# Altium PCB stimu.PcbDoc (part 2 of 2)
Units mm, origin at the board's own origin, x right, y up, seen from the top; angles counter-clockwise.
Board outline 36 x 36 mm, 6 copper layers (Top Layer, Signal Layer 1, Signal Layer 2, Signal Layer 3, Signal Layer 4, Bottom Layer), stack 1.231 mm thick; 97 components, 85 nets, 388 pads, 160 vias.
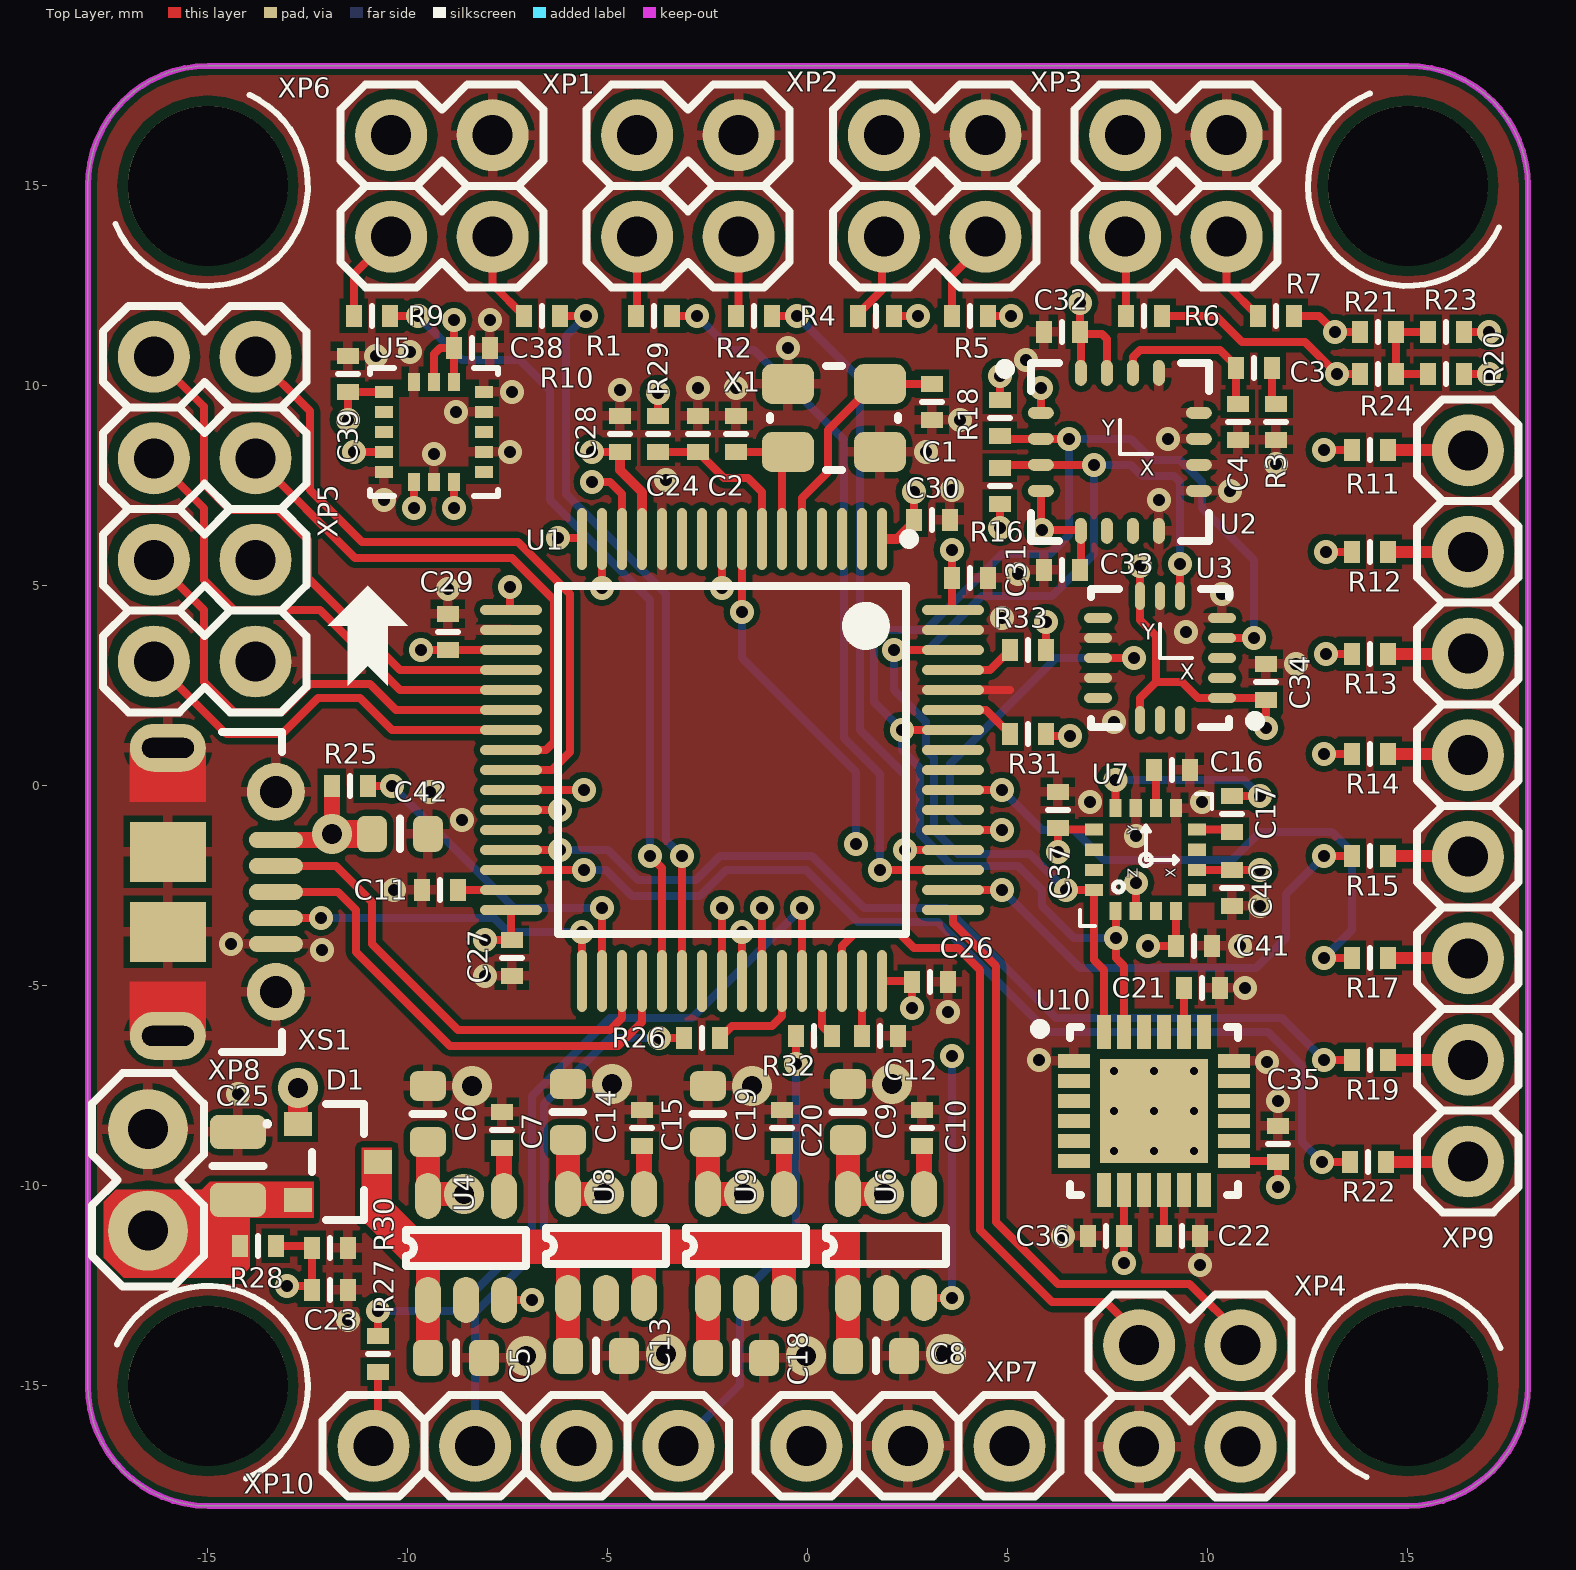
[diagram p0: Top Layer view]

## Via types
v1: diameter 0.6, hole 0.3, Top Layer to Bottom Layer, tented both sides, 137 vias
v2: diameter 1, hole 0.5, Top Layer to Bottom Layer, tented both sides, 14 vias
v3: diameter 0.5, hole 0.2, Top Layer to Bottom Layer, 9 vias

## Nets (pads, with @x,y where several pads share a name; then routed paths per layer and width w, separated by ;. In a path a pad name is that pad's centre, name@x,y a point inside that pad or via, vN(x,y) a via of type N, cw(c..) or ccw(c..) an arc to the next point about the centre after c; other vN are vias at no path point) (continued)
VDD: (continued)
  Top Layer w0.2: v1(-11.5,9.15) C39.1 ; C39.1@-11.45,9.85 U5.1 ; v1(-9.675,3.4) C29.1@-9.1,3.4 ; U5.15 -9.35,10.8 -9.2,10.95 C38.1 ; C29.1 U1.19 ; v1(-8.85,6.95) U5.8 U5.8@-8.85,7.65 ; U5.14 C38.1 ; v1(-8.85,11.65) C38.1 ; v1(-8.075,-3.85) -7.5,-3.85 -7.425,-3.775 U1.32 ; v1(-5.4,8.35) C28.1 ; R29.2 v1(-3.75,9.825) ; U1.48 2.575,-4.875 C26.1 v1(2.6,-5.55) ; C30.1 v1(2.65,7.35) ; v1(3.6,5.9) C31.1 3.6,4.425 U1.64 ; v1(4.8,6.45) R16.1 ; R18.1@4.8,9.6 R18.1 v1(4.8,10.25) ; U2.4 5.825,6.425 v1(5.85,6.4) 6.8,6.4 U2.5 6.825,5.375 C33.1@6.8,5.35 ; U2.1 v1(5.825,9.95) ; v1(6.25,-1.65) 6.25,-1.1 C37.1@6.262,-1.088 ; C37.1@6.262,-0.995 C37.1@6.262,-1.088 ; v1(6.8,12.075) C32.1 C32.1@6.8,11.3 ; U2.16 6.825,11.275 C32.1@6.8,11.3 ; U7.13 C37.1@6.262,-1.088 ; U2.15 7.475,11.175 7.35,11.3 C32.1@6.8,11.3 ; v1(7.9,-11.925) C36.1@7.9,-11.35 ; C36.1 U10.8 ; U7.2 v1(8.196,-2.425) ; U3.14 8.3,2.2 8.7,2.6 ; U3.8 8.3,4.15 8.7,3.75 8.7,2.6 ; U3.8@8.3,4.9 v1(8.3,5.5) ; v1(8.5,-4) C41.1 U7.4 ; U7.6 C40.1 v1(11.3,-2.1) ; U10.13 11.725,-9.375 C35.1 ; v1(11.45,1.45) C34.1 11.45,2.2 U3.1 9.75,2.2 9.35,2.6 8.7,2.6 ; v1(11.75,-10.025) C35.1@11.75,-9.45 ; R23.1@16.45,11.35 v1(17.025,11.35)
  Top Layer w0.25: C28.1 -4.7,7.9 -4.15,7.35 U1.13 ; U1.1 2.225,6.175 2.65,6.6 C30.1@2.7,6.6
  Top Layer w0.6: C14.2 U8.5 v2(-5.1,-10.2)
XTALI: C1.1 U1.5 X1.1 | length 5.9
  Top Layer w0.2: U1.5 -0.15,7.2 0.5,7.85 0.5,8.9 1.55,9.95 X1.1@1.55,10.05 ; X1.1 C1.1
XTALO: C2.1 U1.6 X1.3 | length 3.3
  Top Layer w0.2: C2.1 -0.75,8.35 -0.65,8.25 U1.6
pads on no net: U1.2 U1.3 U1.4 U1.10 U1.11 U1.28 U1.39 U1.54 U1.56 U1.57 U2.6 U2.7 U3.2 U3.3 U3.9 U3.13 U3.15 U3.16 U5.2 U5.3 U5.9 U5.11 U7.3 U7.5 U7.7 U7.14 U7.15 U10.2 U10.3 U10.4 U10.5 U10.6 U10.7 U10.12 U10.14 U10.15 U10.16 U10.17 U10.19 U10.21 U10.22

## Polygon pours and split planes (outlines as drawn)
VDD on Signal Layer 2 "VDD" (solid, remove dead copper, pour order 2): -19.5,18.65 16.4,18.65 18.85,16.2 18.85,-16 15.7,-19.15 -15.7,-19.15 -18.9,-15.95
3V3EXT on Signal Layer 4 "3V3E" (solid, remove dead copper, pour order 10): -9.8,-11.6 -9.8,7.65 -12.05,9.9 -12.05,17.822 5.722,17.822 5.722,12.25 -3.35,3.178 -3.35,-11.6
VBUS on Signal Layer 4 "VBUS" (solid, remove dead copper, pour order 12): -15.25,0.4 -15.25,-8.55 -10.15,-8.55 -10.15,0.4
5V1 on Signal Layer 4 "5V1" (solid, remove dead copper, pour order 6): 6.25,17.85 17.8,17.85 17.8,-11.65 -2.9,-11.65 -2.9,2.95 6.25,12.25
GND on Bottom Layer "GND" (solid, remove dead copper, pour order 16): -19.85,17.6 -18.25,19.2 -5.7,19.2 16.35,19.2 19.75,15.8 19.75,-15.45 15.9,-19.3 -16,-19.3 -18.7,-16.6
GND on Top Layer "GND" (solid, remove dead copper, pour order 14): -19.05,18.25 18.5,18.25 18.5,-18.65 -19.05,-18.65
GND on Signal Layer 1 "GND" (solid, remove dead copper, pour order 0): -19.2,18.75 19.15,18.75 19.15,-18.95 -19.2,-18.95
GND on Signal Layer 3 "GND" (solid, remove dead copper, pour order 18): -19,19 19,19 19,-19 -19,-19

## Keep-outs
Keep-Out Layer:
  the board outline again, w0.15

## Other copper
Top Layer:
  region net VCOM: -11.15,-9.05 -11.15,-10.85 -10.05,-11.95 0.55,-11.95 0.7,-12.1 0.7,-12.75 1.3,-12.75 1.3,-11.1 -9.7,-11.1 -10.4,-10.4 -10.4,-9.05
  region net VCC: -12.35,-9.9 -14.95,-9.9 -15.15,-10.1 -17.3,-10.1 -17.6,-10.4 -17.6,-11.8 -17.1,-12.3 -14.2,-12.3 -13.95,-12.05 -13.95,-11.3 -13.95,-10.8 -12.35,-10.8

## Silkscreen, mask and mechanical layers (free items; w line width, h text height)
Top Overlay:
  region: -12,4 -11,5 -10,4 -10.5,4 -10.5,2.5 -11,3 -11.5,2.5 -11.5,4
  lines w0.1: 7.8,9.15 7.8,8.3 8.6,8.3 ; 8.8,4.05 8.8,3.2 9.6,3.2
  lines w0.15: -17.314,14.053 ccw(c-15,15) -13.965,17.276 ; -17.276,-13.965 cw(c-15,-15) -14.053,-17.314 ; 13.965,-17.276 cw(c15,-15) 17.314,-14.053 ; 14.053,17.314 ccw(c15,15) 17.276,13.965
  text "Y" at 7.35,8.75 h0.4
  text "X" at 8.3,7.75 h0.4
  text "Y" at 8.35,3.65 h0.4
  text "X" at 9.3,2.65 h0.4
Bottom Overlay:
  region: -5.35,1.9 -1.35,5.9 2.65,1.9 0.65,1.9 0.65,-3.1 -1.35,-1.1 -3.35,-3.1 -3.35,1.9
  lines w0.15: -12.1,12.7 -12.1,14.55 -11.3,15.35 ; -6.05,12.65 -6.05,14.5 -5.25,15.3 ; 0.1,12.7 0.1,14.55 0.9,15.35 ; 6.15,12.65 6.15,14.5 6.95,15.3
  text "GND" at -5.85,17.65 h0.8 r90
  text "GND" at 0.35,17.65 h0.8 r90
  text "GND" at 6.5,17.65 h0.8 r90
  text "GND" at 12.5,17.65 h0.8 r90
  text "3V3" at 0.65,12.45 h1 r90
  text "3V3" at -5.5,12.35 h1 r90
  text "U3_TX" at -3.6,12.3 h1 r90
  text "5V1" at 6.65,12.25 h1 r90
  text "3V3" at -11.5,12.2 h1 r90
  text "U3_RX" at -1.35,12.2 h1 r90
  text "I2C3_SCL" at 8.75,12.2 h1 r90
  text "I2C3_SDA" at 10.65,12.2 h1 r90
  text "U6_TX" at -9.6,12.1 h1 r90
  text "U6_RX" at -7.35,12 h1 r90
  text "I2C1_SCL" at 2.5,12 h1 r90
  text "I2C1_SDA" at 4.6,12 h1 r90
  text "T5_C1" at 14.9,8 h0.8
  text "CS" at -9.25,5.9 h0.8
  text "CE" at -6.55,5.85 h0.8
  text "T5_C2" at 14.95,5.4 h0.8
  text "SCK" at -9.25,4.8 h0.8
  text "IRQ" at -6.5,4.75 h0.8
  text "MISO" at -9.25,3.65 h0.8
  text "VDD" at -6.5,3.65 h0.8
  text "T5_C3" at 14.9,2.9 h1
  text "MOSI" at -9.25,2.45 h0.8
  text "GND" at -6.5,2.45 h0.8
  text "T5_C4" at 14.95,0.35 h1
  text "T2_C1" at 14.95,-2.2 h1
  text "USB" at -14.25,-2.95 h1
  text "T2_C2" at 14.9,-4.7 h1
  text "STimuF2_v1.0" at 8.25,-5.5 h2
  text "T2_C3" at 15,-7.25 h1
  text "GND" at -12.9,-9 h0.8
  text "T2_C4" at 15,-9.85 h1
  text "+VBAT" at -11.4,-11.55 h0.8
  text "SWC" at 12.15,-14.45 h0.6 r270
  text "SWD" at 6.4,-14.55 h0.6 r270
  text "GND" at 2,-14.95 h1 r270
  text "3V3RCV" at 4.55,-14.95 h1 r270
  text "U1_RX" at -0.55,-15 h1 r270
  text "TIM1_CH4" at -11.2,-15.1 h1 r270
  text "CAN1_RX" at -6.15,-15.1 h1 r270
  text "CAN1_TX" at -3.75,-15.15 h1 r270
  text "TIM1_CH3" at -8.9,-15.2 h1 r270
  text "GND" at 6.5,-17.1 h0.6 r270
  text "VDD" at 12.1,-17.15 h0.6 r270
Mechanical 15:
  lines w0.1: -0.2,0 0.2,0 ; 0,-0.2 0,0.2

## Text inside footprints (layer, text, board x,y; h text height)
U7: Top Overlay "X" at 9.2,-2.3 h0.26 r90; Top Overlay "Y" at 8.247,-1.19 h0.26 r90; Top Overlay "Z" at 8.247,-2.3 h0.26 r90